# Allegro board sensor_board_routing.brd
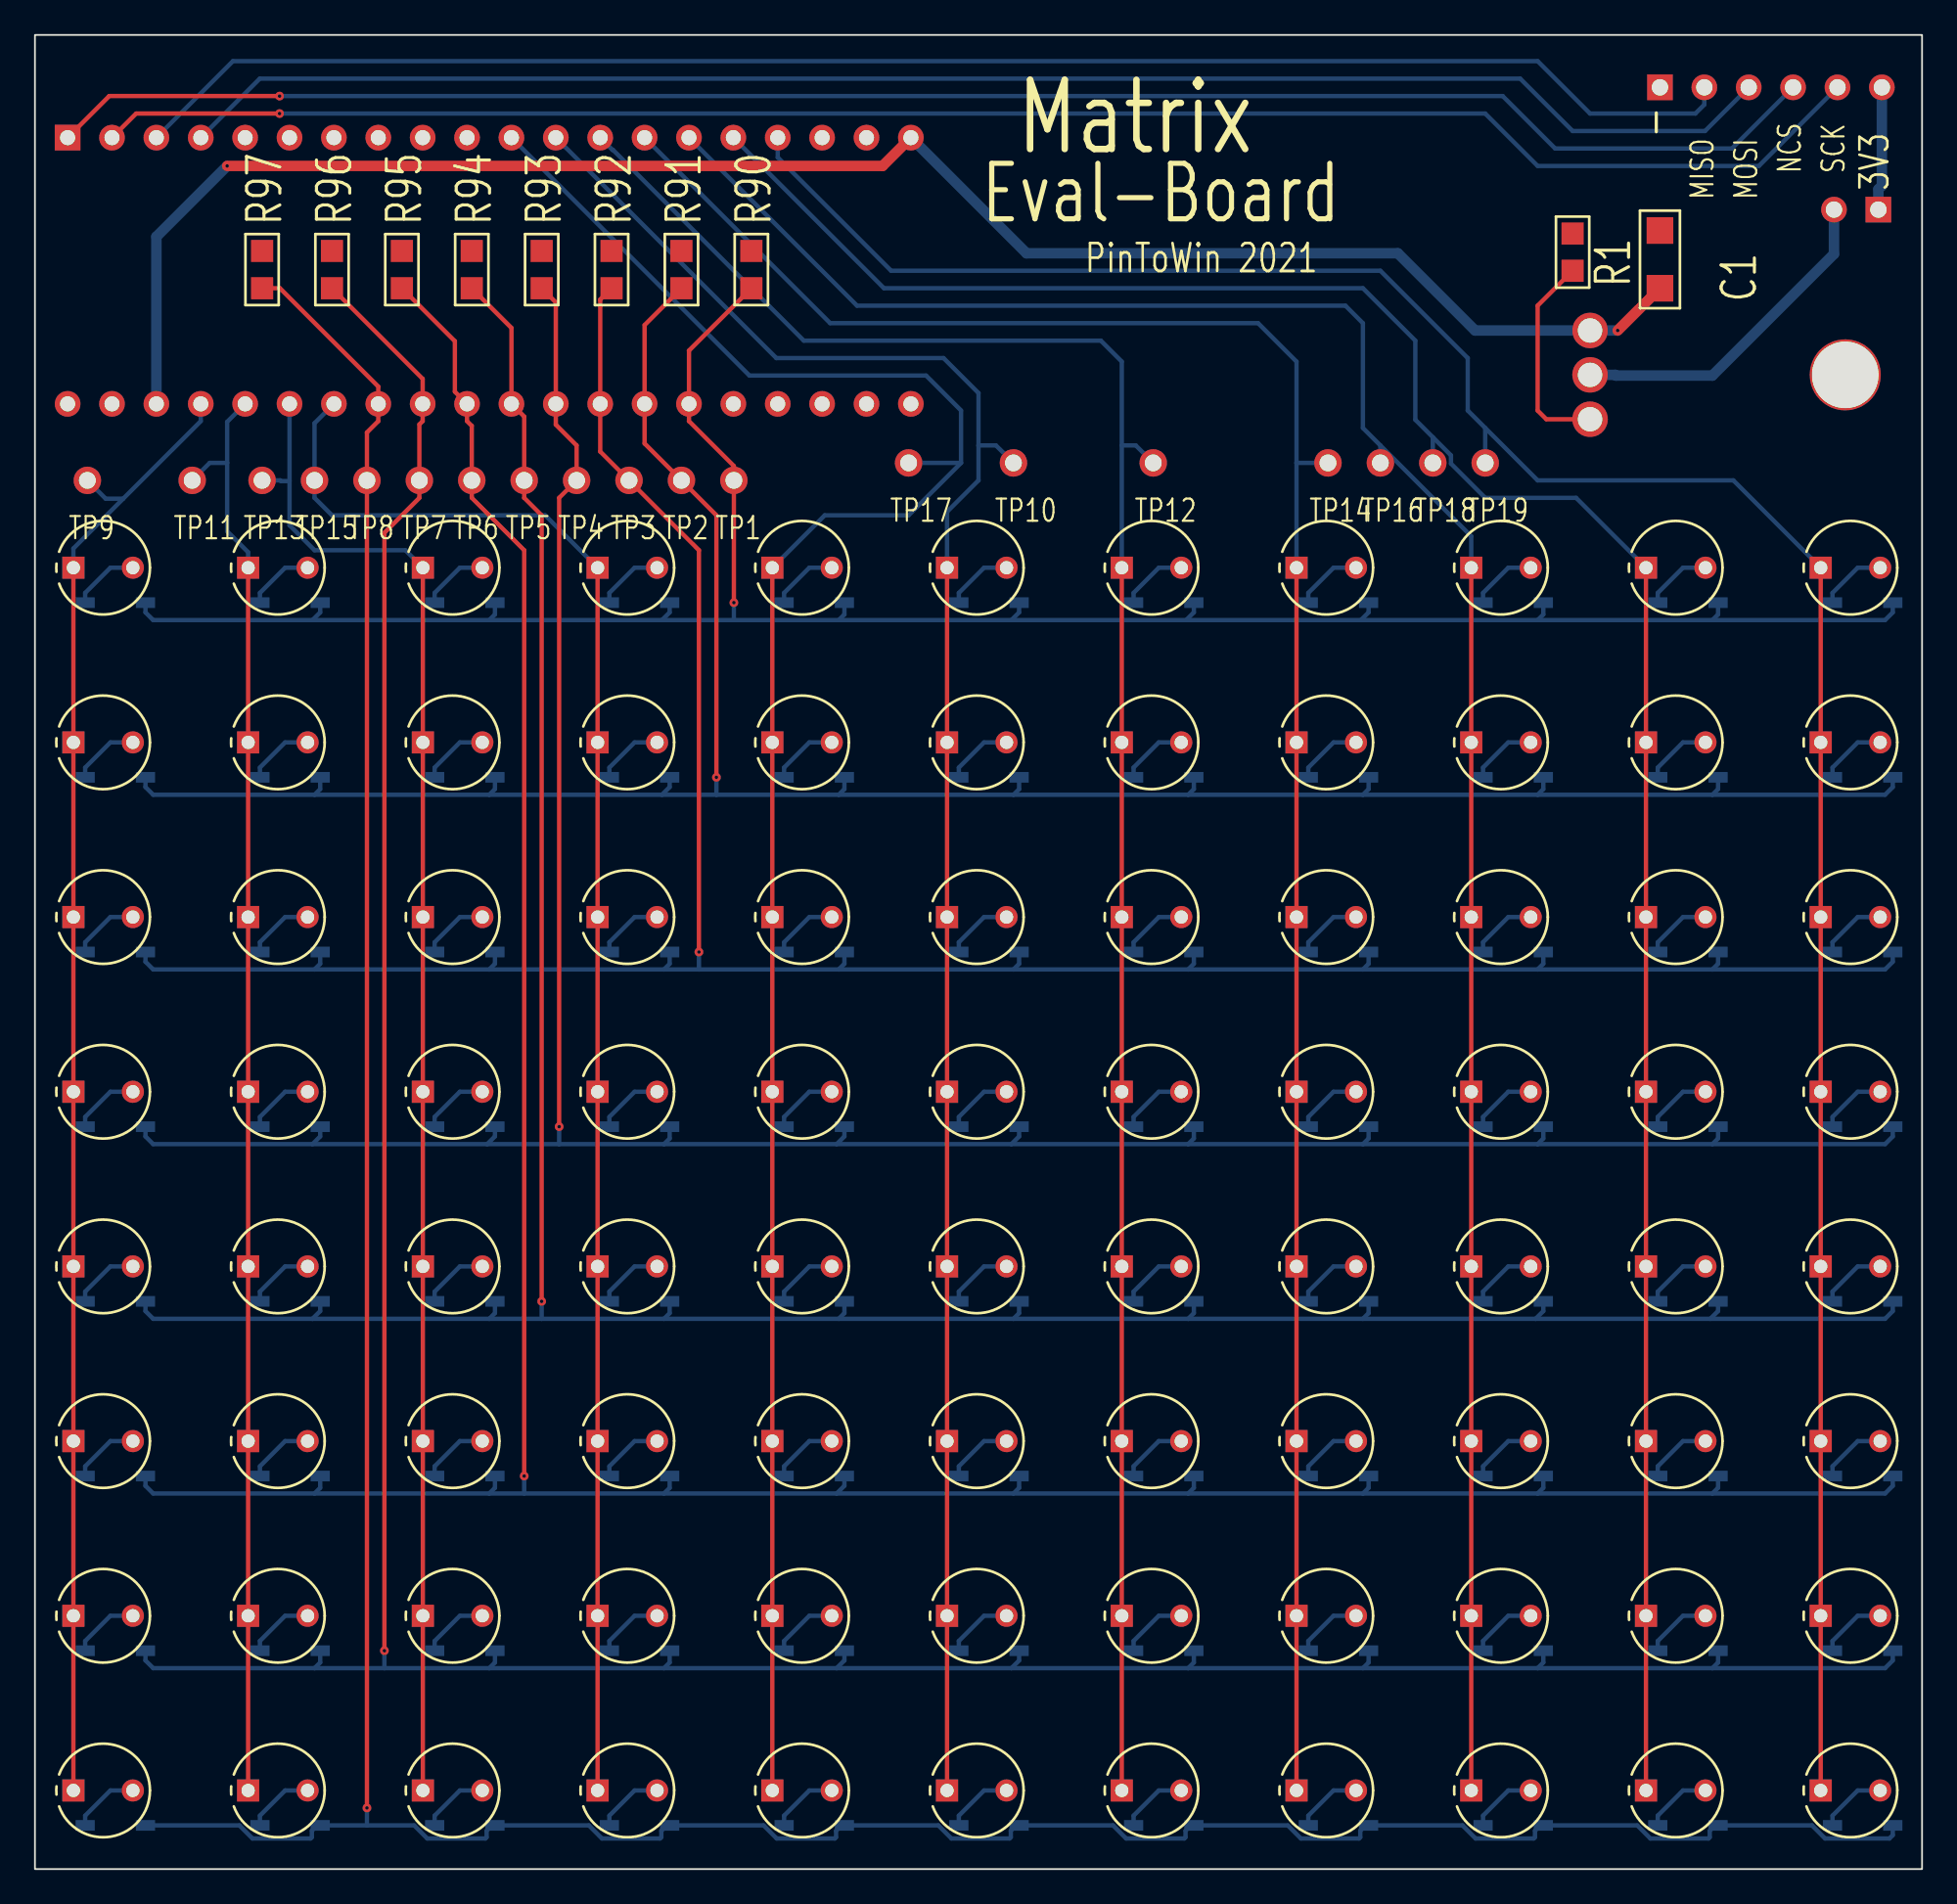
[diagram p0: board, top side]
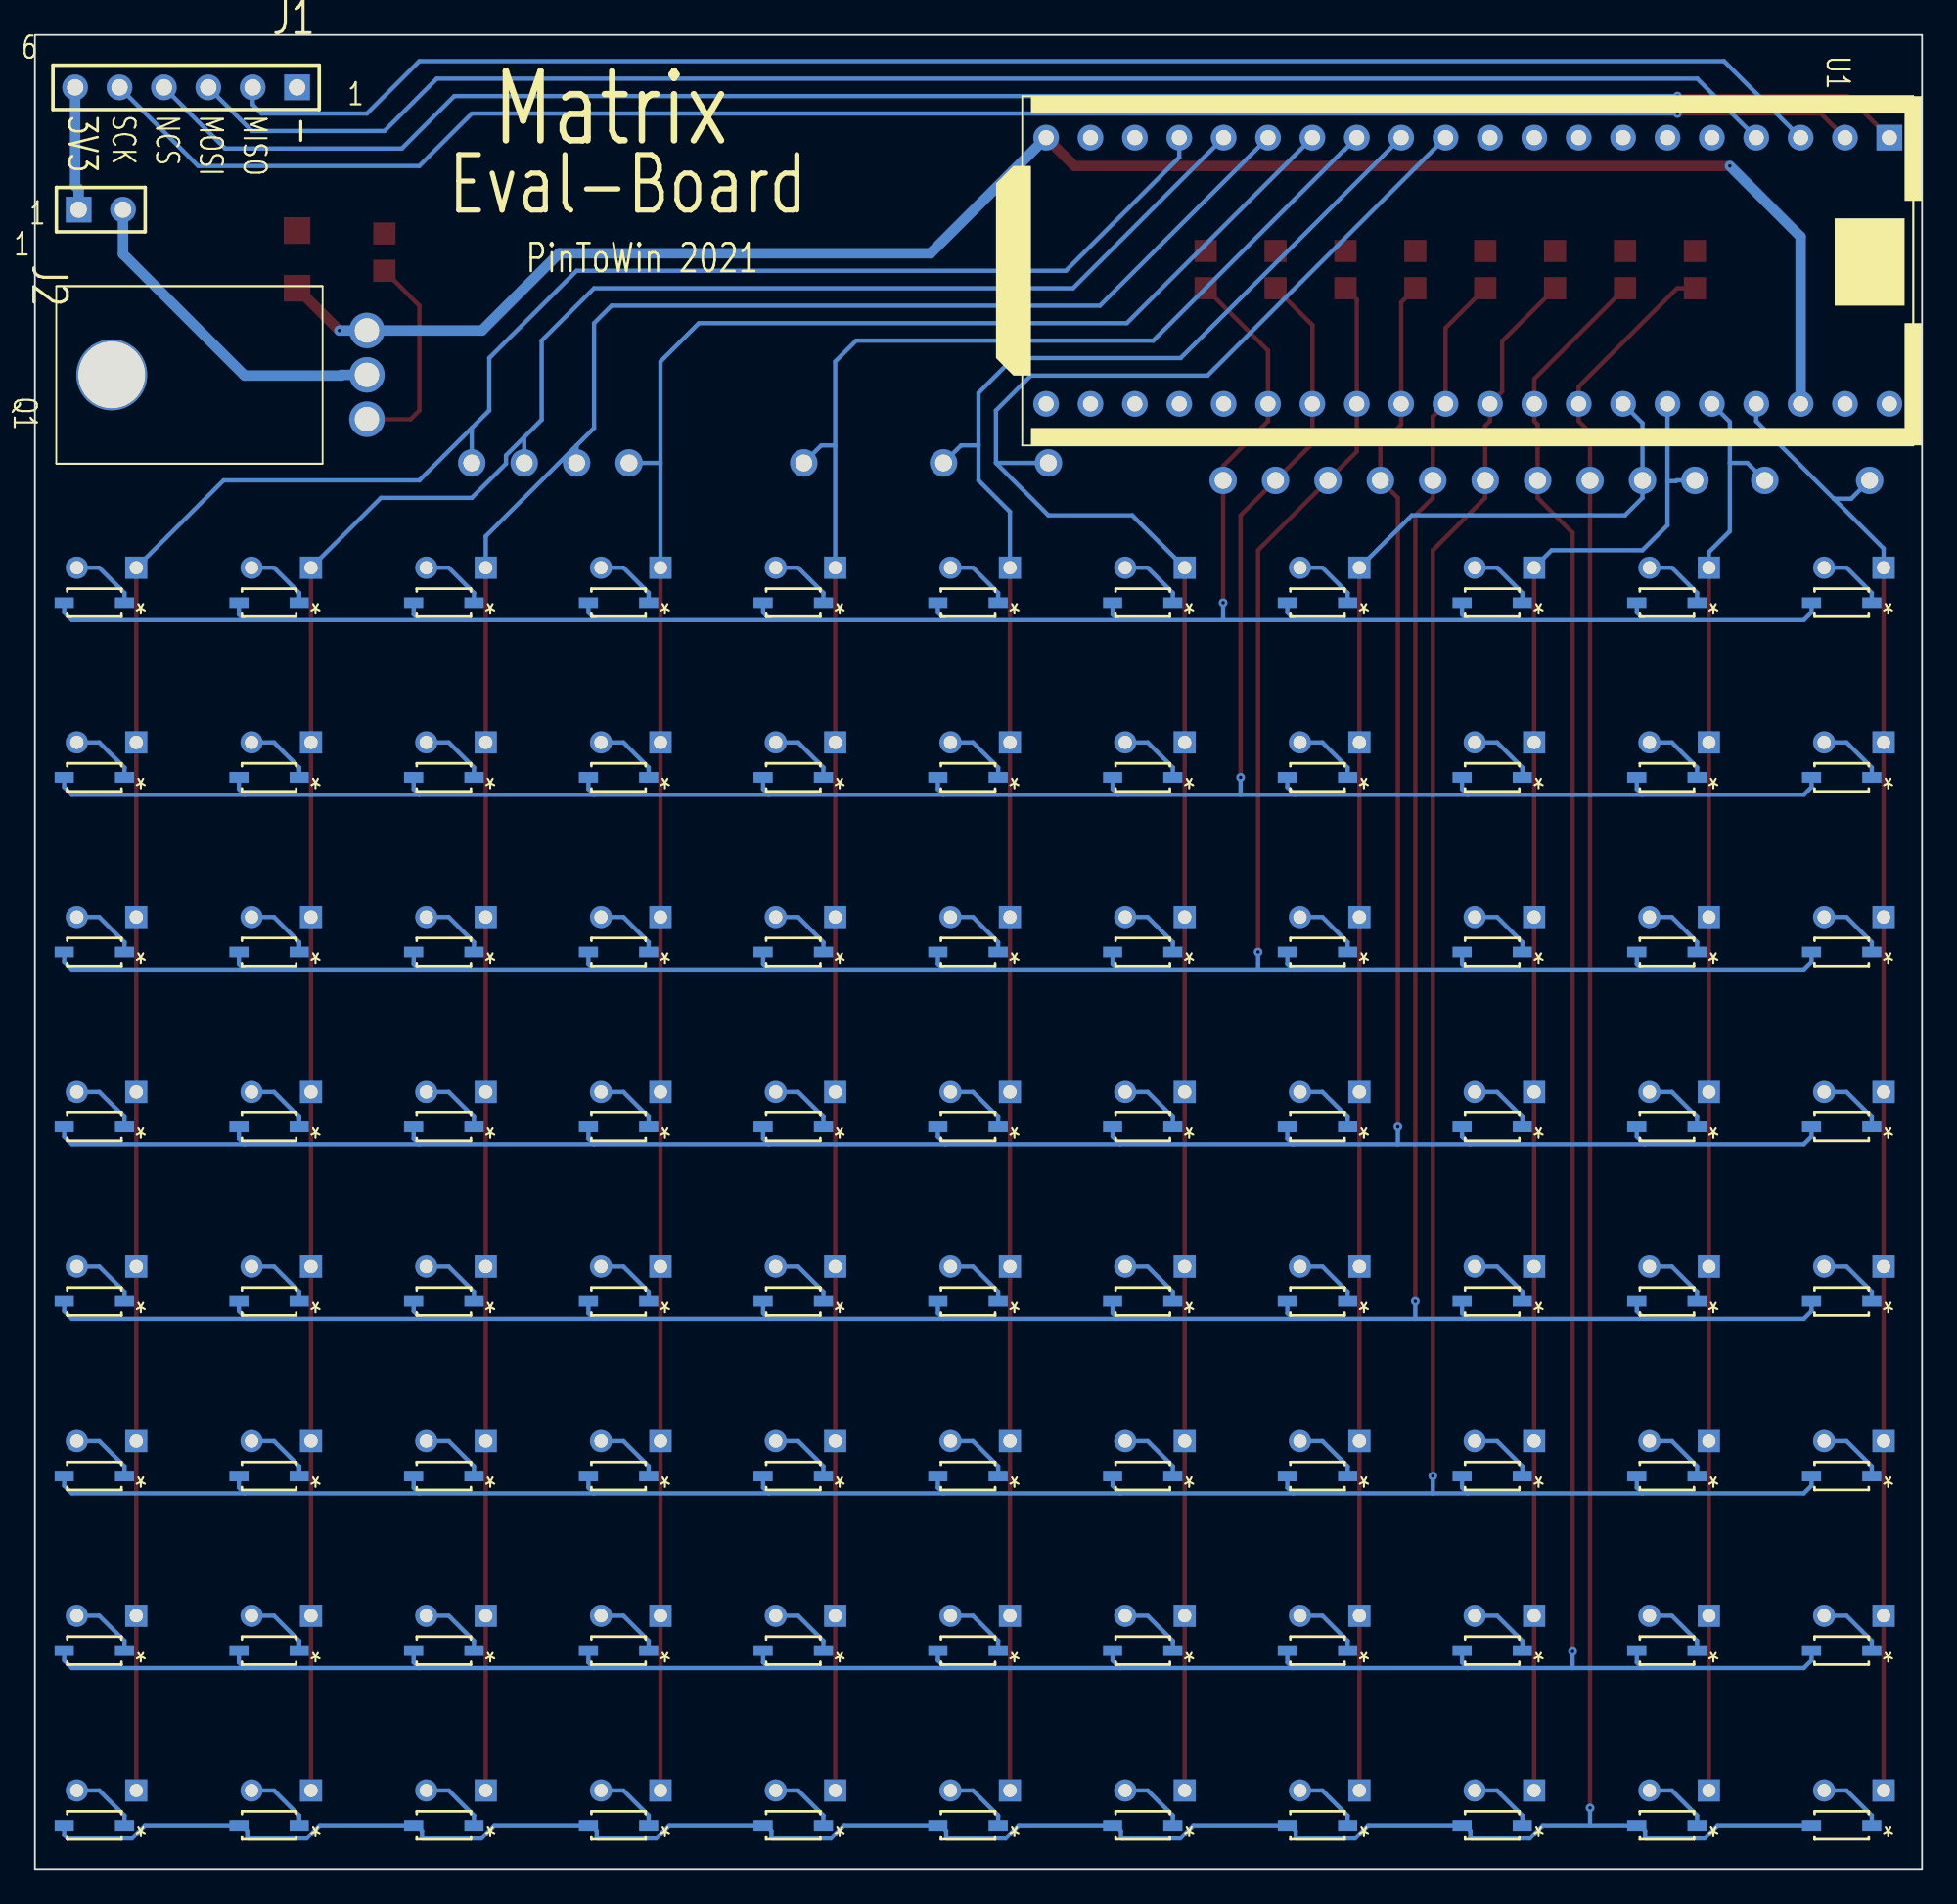
[diagram p1: board, bottom side, seen from below]

Outline 108 x 105 mm; copper layers: TOP, BOTTOM. Coordinates in mm from the lower left corner of the outline.
Outline path: rectangle 0,0 108,105

## Design rules (mm)
constraint set DEFAULT: min track width 0.1

## Placement (name value [footprint] x y rotation side)
C1  1uF  [SMC1206]  93 90.5 90 top
D1  D1N4148  [SOD123_DIO]  4.6 72.5 0 bottom
D2  D1N4148  [SOD123_DIO]  14.6 72.5 0 bottom
D3  D1N4148  [SOD123_DIO]  24.6 72.5 0 bottom
D4  D1N4148  [SOD123_DIO]  34.6 72.5 0 bottom
D5  D1N4148  [SOD123_DIO]  44.6 72.5 0 bottom
D6  D1N4148  [SOD123_DIO]  54.6 72.5 0 bottom
D7  D1N4148  [SOD123_DIO]  64.6 72.5 0 bottom
D8  D1N4148  [SOD123_DIO]  74.6 72.5 0 bottom
D9  D1N4148  [SOD123_DIO]  84.6 72.5 0 bottom
D10  D1N4148  [SOD123_DIO]  94.6 72.5 0 bottom
D11  D1N4148  [SOD123_DIO]  104.6 72.5 0 bottom
D12  D1N4148  [SOD123_DIO]  4.6 62.5 0 bottom
D13  D1N4148  [SOD123_DIO]  14.6 62.5 0 bottom
D14  D1N4148  [SOD123_DIO]  24.6 62.5 0 bottom
D15  D1N4148  [SOD123_DIO]  34.6 62.5 0 bottom
D16  D1N4148  [SOD123_DIO]  44.6 62.5 0 bottom
D17  D1N4148  [SOD123_DIO]  54.6 62.5 0 bottom
D18  D1N4148  [SOD123_DIO]  64.6 62.5 0 bottom
D19  D1N4148  [SOD123_DIO]  74.6 62.5 0 bottom
D20  D1N4148  [SOD123_DIO]  84.6 62.5 0 bottom
D21  D1N4148  [SOD123_DIO]  94.6 62.5 0 bottom
D22  D1N4148  [SOD123_DIO]  104.6 62.5 0 bottom
D23  D1N4148  [SOD123_DIO]  4.6 52.5 0 bottom
D24  D1N4148  [SOD123_DIO]  14.6 52.5 0 bottom
D25  D1N4148  [SOD123_DIO]  24.6 52.5 0 bottom
D26  D1N4148  [SOD123_DIO]  34.6 52.5 0 bottom
D27  D1N4148  [SOD123_DIO]  44.6 52.5 0 bottom
D28  D1N4148  [SOD123_DIO]  54.6 52.5 0 bottom
D29  D1N4148  [SOD123_DIO]  64.6 52.5 0 bottom
D30  D1N4148  [SOD123_DIO]  74.6 52.5 0 bottom
D31  D1N4148  [SOD123_DIO]  84.6 52.5 0 bottom
D32  D1N4148  [SOD123_DIO]  94.6 52.5 0 bottom
D33  D1N4148  [SOD123_DIO]  104.6 52.5 0 bottom
D34  D1N4148  [SOD123_DIO]  4.6 42.5 0 bottom
D35  D1N4148  [SOD123_DIO]  14.6 42.5 0 bottom
D36  D1N4148  [SOD123_DIO]  24.6 42.5 0 bottom
D37  D1N4148  [SOD123_DIO]  34.6 42.5 0 bottom
D38  D1N4148  [SOD123_DIO]  44.6 42.5 0 bottom
D39  D1N4148  [SOD123_DIO]  54.6 42.5 0 bottom
D40  D1N4148  [SOD123_DIO]  64.6 42.5 0 bottom
D41  D1N4148  [SOD123_DIO]  74.6 42.5 0 bottom
D42  D1N4148  [SOD123_DIO]  84.6 42.5 0 bottom
D43  D1N4148  [SOD123_DIO]  94.6 42.5 0 bottom
D44  D1N4148  [SOD123_DIO]  104.6 42.5 0 bottom
D45  D1N4148  [SOD123_DIO]  4.6 32.5 0 bottom
D46  D1N4148  [SOD123_DIO]  14.6 32.5 0 bottom
D47  D1N4148  [SOD123_DIO]  24.6 32.5 0 bottom
D48  D1N4148  [SOD123_DIO]  34.6 32.5 0 bottom
D49  D1N4148  [SOD123_DIO]  44.6 32.5 0 bottom
D50  D1N4148  [SOD123_DIO]  54.6 32.5 0 bottom
D51  D1N4148  [SOD123_DIO]  64.6 32.5 0 bottom
D52  D1N4148  [SOD123_DIO]  74.6 32.5 0 bottom
D53  D1N4148  [SOD123_DIO]  84.6 32.5 0 bottom
D54  D1N4148  [SOD123_DIO]  94.6 32.5 0 bottom
D55  D1N4148  [SOD123_DIO]  104.6 32.5 0 bottom
D56  D1N4148  [SOD123_DIO]  4.6 22.5 0 bottom
D57  D1N4148  [SOD123_DIO]  14.6 22.5 0 bottom
D58  D1N4148  [SOD123_DIO]  24.6 22.5 0 bottom
D59  D1N4148  [SOD123_DIO]  34.6 22.5 0 bottom
D60  D1N4148  [SOD123_DIO]  44.6 22.5 0 bottom
D61  D1N4148  [SOD123_DIO]  54.6 22.5 0 bottom
D62  D1N4148  [SOD123_DIO]  64.6 22.5 0 bottom
D63  D1N4148  [SOD123_DIO]  74.6 22.5 0 bottom
D64  D1N4148  [SOD123_DIO]  84.6 22.5 0 bottom
D65  D1N4148  [SOD123_DIO]  94.6 22.5 0 bottom
D66  D1N4148  [SOD123_DIO]  104.6 22.5 0 bottom
D67  D1N4148  [SOD123_DIO]  4.6 12.5 0 bottom
D68  D1N4148  [SOD123_DIO]  14.6 12.5 0 bottom
D69  D1N4148  [SOD123_DIO]  24.6 12.5 0 bottom
D70  D1N4148  [SOD123_DIO]  34.6 12.5 0 bottom
D71  D1N4148  [SOD123_DIO]  44.6 12.5 0 bottom
D72  D1N4148  [SOD123_DIO]  54.6 12.5 0 bottom
D73  D1N4148  [SOD123_DIO]  64.6 12.5 0 bottom
D74  D1N4148  [SOD123_DIO]  74.6 12.5 0 bottom
D75  D1N4148  [SOD123_DIO]  84.6 12.5 0 bottom
D76  D1N4148  [SOD123_DIO]  94.6 12.5 0 bottom
D77  D1N4148  [SOD123_DIO]  104.6 12.5 0 bottom
D78  D1N4148  [SOD123_DIO]  4.6 2.5 0 bottom
D79  D1N4148  [SOD123_DIO]  14.6 2.5 0 bottom
D80  D1N4148  [SOD123_DIO]  24.6 2.5 0 bottom
D81  D1N4148  [SOD123_DIO]  34.6 2.5 0 bottom
D82  D1N4148  [SOD123_DIO]  44.6 2.5 0 bottom
D83  D1N4148  [SOD123_DIO]  54.6 2.5 0 bottom
D84  D1N4148  [SOD123_DIO]  64.6 2.5 0 bottom
D85  D1N4148  [SOD123_DIO]  74.6 2.5 0 bottom
D86  D1N4148  [SOD123_DIO]  84.6 2.5 0 bottom
D87  D1N4148  [SOD123_DIO]  94.6 2.5 0 bottom
D88  D1N4148  [SOD123_DIO]  104.6 2.5 0 bottom
J1  CON6  [BLKCON100VHTM1SQW1006]  93 102 0 bottom
J2  JUMPER  [BLKCON100VHTM1SQW1002]  105.5 95 180 bottom
Q1  IRF9530N/TO220  [TO220ABH]  89 83 180 bottom
R1  100  [SMR0805]  88 91.5 90 top
R2  5k-20k  [LDR1_NTE]  2.2 74.5 0 top
R3  5k-20k  [LDR1_NTE]  12.2 74.5 0 top
R4  5k-20k  [LDR1_NTE]  22.2 74.5 0 top
R5  5k-20k  [LDR1_NTE]  32.2 74.5 0 top
R6  5k-20k  [LDR1_NTE]  42.2 74.5 0 top
R7  5k-20k  [LDR1_NTE]  52.2 74.5 0 top
R8  5k-20k  [LDR1_NTE]  62.2 74.5 0 top
R9  5k-20k  [LDR1_NTE]  72.2 74.5 0 top
R10  5k-20k  [LDR1_NTE]  82.2 74.5 0 top
R11  5k-20k  [LDR1_NTE]  92.2 74.5 0 top
R12  5k-20k  [LDR1_NTE]  102.2 74.5 0 top
R13  5k-20k  [LDR1_NTE]  2.2 64.5 0 top
R14  5k-20k  [LDR1_NTE]  12.2 64.5 0 top
R15  5k-20k  [LDR1_NTE]  22.2 64.5 0 top
R16  5k-20k  [LDR1_NTE]  32.2 64.5 0 top
R17  5k-20k  [LDR1_NTE]  42.2 64.5 0 top
R18  5k-20k  [LDR1_NTE]  52.2 64.5 0 top
R19  5k-20k  [LDR1_NTE]  62.2 64.5 0 top
R20  5k-20k  [LDR1_NTE]  72.2 64.5 0 top
R21  5k-20k  [LDR1_NTE]  82.2 64.5 0 top
R22  5k-20k  [LDR1_NTE]  92.2 64.5 0 top
R23  5k-20k  [LDR1_NTE]  102.2 64.5 0 top
R24  5k-20k  [LDR1_NTE]  2.2 54.5 0 top
R25  5k-20k  [LDR1_NTE]  12.2 54.5 0 top
R26  5k-20k  [LDR1_NTE]  22.2 54.5 0 top
R27  5k-20k  [LDR1_NTE]  32.2 54.5 0 top
R28  5k-20k  [LDR1_NTE]  42.2 54.5 0 top
R29  5k-20k  [LDR1_NTE]  52.2 54.5 0 top
R30  5k-20k  [LDR1_NTE]  62.2 54.5 0 top
R31  5k-20k  [LDR1_NTE]  72.2 54.5 0 top
R32  5k-20k  [LDR1_NTE]  82.2 54.5 0 top
R33  5k-20k  [LDR1_NTE]  92.2 54.5 0 top
R34  5k-20k  [LDR1_NTE]  102.2 54.5 0 top
R35  5k-20k  [LDR1_NTE]  2.2 44.5 0 top
R36  5k-20k  [LDR1_NTE]  12.2 44.5 0 top
R37  5k-20k  [LDR1_NTE]  22.2 44.5 0 top
R38  5k-20k  [LDR1_NTE]  32.2 44.5 0 top
R39  5k-20k  [LDR1_NTE]  42.2 44.5 0 top
R40  5k-20k  [LDR1_NTE]  52.2 44.5 0 top
R41  5k-20k  [LDR1_NTE]  62.2 44.5 0 top
R42  5k-20k  [LDR1_NTE]  72.2 44.5 0 top
R43  5k-20k  [LDR1_NTE]  82.2 44.5 0 top
R44  5k-20k  [LDR1_NTE]  92.2 44.5 0 top
R45  5k-20k  [LDR1_NTE]  102.2 44.5 0 top
R46  5k-20k  [LDR1_NTE]  2.2 34.5 0 top
R47  5k-20k  [LDR1_NTE]  12.2 34.5 0 top
R48  5k-20k  [LDR1_NTE]  22.2 34.5 0 top
R49  5k-20k  [LDR1_NTE]  32.2 34.5 0 top
R50  5k-20k  [LDR1_NTE]  42.2 34.5 0 top
R51  5k-20k  [LDR1_NTE]  52.2 34.5 0 top
R52  5k-20k  [LDR1_NTE]  62.2 34.5 0 top
R53  5k-20k  [LDR1_NTE]  72.2 34.5 0 top
R54  5k-20k  [LDR1_NTE]  82.2 34.5 0 top
R55  5k-20k  [LDR1_NTE]  92.2 34.5 0 top
R56  5k-20k  [LDR1_NTE]  102.2 34.5 0 top
R57  5k-20k  [LDR1_NTE]  2.2 24.5 0 top
R58  5k-20k  [LDR1_NTE]  12.2 24.5 0 top
R59  5k-20k  [LDR1_NTE]  22.2 24.5 0 top
R60  5k-20k  [LDR1_NTE]  32.2 24.5 0 top
R61  5k-20k  [LDR1_NTE]  42.2 24.5 0 top
R62  5k-20k  [LDR1_NTE]  52.2 24.5 0 top
R63  5k-20k  [LDR1_NTE]  62.2 24.5 0 top
R64  5k-20k  [LDR1_NTE]  72.2 24.5 0 top
R65  5k-20k  [LDR1_NTE]  82.2 24.5 0 top
R66  5k-20k  [LDR1_NTE]  92.2 24.5 0 top
R67  5k-20k  [LDR1_NTE]  102.2 24.5 0 top
R68  5k-20k  [LDR1_NTE]  2.2 14.5 0 top
R69  5k-20k  [LDR1_NTE]  12.2 14.5 0 top
R70  5k-20k  [LDR1_NTE]  22.2 14.5 0 top
R71  5k-20k  [LDR1_NTE]  32.2 14.5 0 top
R72  5k-20k  [LDR1_NTE]  42.2 14.5 0 top
R73  5k-20k  [LDR1_NTE]  52.2 14.5 0 top
R74  5k-20k  [LDR1_NTE]  62.2 14.5 0 top
R75  5k-20k  [LDR1_NTE]  72.2 14.5 0 top
R76  5k-20k  [LDR1_NTE]  82.2 14.5 0 top
R77  5k-20k  [LDR1_NTE]  92.2 14.5 0 top
R78  5k-20k  [LDR1_NTE]  102.2 14.5 0 top
R79  5k-20k  [LDR1_NTE]  2.2 4.5 0 top
R80  5k-20k  [LDR1_NTE]  12.2 4.5 0 top
R81  5k-20k  [LDR1_NTE]  22.2 4.5 0 top
R82  5k-20k  [LDR1_NTE]  32.2 4.5 0 top
R83  5k-20k  [LDR1_NTE]  42.2 4.5 0 top
R84  5k-20k  [LDR1_NTE]  52.2 4.5 0 top
R85  5k-20k  [LDR1_NTE]  62.2 4.5 0 top
R86  5k-20k  [LDR1_NTE]  72.2 4.5 0 top
R87  5k-20k  [LDR1_NTE]  82.2 4.5 0 top
R88  5k-20k  [LDR1_NTE]  92.2 4.5 0 top
R89  5k-20k  [LDR1_NTE]  102.2 4.5 0 top
R90  1k  [SMR0805]  41 90.5 90 top
R91  1k  [SMR0805]  37 90.5 90 top
R92  1k  [SMR0805]  33 90.5 90 top
R93  1k  [SMR0805]  29 90.5 90 top
R94  1k  [SMR0805]  25 90.5 90 top
R95  1k  [SMR0805]  21 90.5 90 top
R96  1k  [SMR0805]  17 90.5 90 top
R97  1k  [SMR0805]  13 90.5 90 top
TP1  ROW0  [TESTCOUP_CUSTOM]  40 79.5 0 top
TP2  ROW1  [TESTCOUP_CUSTOM]  37 79.5 0 top
TP3  ROW2  [TESTCOUP_CUSTOM]  34 79.5 0 top
TP4  ROW3  [TESTCOUP_CUSTOM]  31 79.5 0 top
TP5  ROW4  [TESTCOUP_CUSTOM]  28 79.5 0 top
TP6  ROW5  [TESTCOUP_CUSTOM]  25 79.5 0 top
TP7  ROW6  [TESTCOUP_CUSTOM]  22 79.5 0 top
TP8  ROW7  [TESTCOUP_CUSTOM]  19 79.5 0 top
TP9  COL0  [TESTCOUP_CUSTOM]  3 79.5 0 top
TP10  COL0  [TESTCOUP_CUSTOM]  56 80.5 0 top
TP11  COL0  [TESTCOUP_CUSTOM]  9 79.5 0 top
TP12  COL0  [TESTCOUP_CUSTOM]  64 80.5 0 top
TP13  COL0  [TESTCOUP_CUSTOM]  13 79.5 0 top
TP14  COL0  [TESTCOUP_CUSTOM]  74 80.5 0 top
TP15  COL0  [TESTCOUP_CUSTOM]  16 79.5 0 top
TP16  COL0  [TESTCOUP_CUSTOM]  77 80.5 0 top
TP17  COL0  [TESTCOUP_CUSTOM]  50 80.5 0 top
TP18  COL0  [TESTCOUP_CUSTOM]  80 80.5 0 top
TP19  COL0  [TESTCOUP_CUSTOM]  83 80.5 0 top
U1  STM32F411  [BLACKPILL_FOOTPRINT]  26 91.5 270 bottom

## Library data of the parts
C1 = CAP NP
D1-D88 = 1N4148: Tolerance: TOL
J1 = CON6
J2 = JUMPER
Q1 = IRF9530N/TO_0
R1 R90-R97 = R
R2-R89 = LDR: User Part Number: PN
TP1-TP19 = TEST POINT
U1 = STM32_Bluepill

## Footprints (pads in the part's own frame, mm; a bottom-side part is the same pattern mirrored in y, then rotated)
BLACKPILL_FOOTPRINT
  rect 1.473x1.473 hole 0.864: 1(-7.62,24.13)
  round 1.473 hole 0.864: 2(-7.62,21.59) 3(-7.62,19.05) 4(-7.62,16.51) 5(-7.62,13.97) 6(-7.62,11.43) 7(-7.62,8.89) 8(-7.62,6.35) 9(-7.62,3.81) 10(-7.62,1.27) 11(-7.62,-1.27) 12(-7.62,-3.81) 13(-7.62,-6.35) 14(-7.62,-8.89) 15(-7.62,-11.43) 16(-7.62,-13.97) 17(-7.62,-16.51) 18(-7.62,-19.05) 19(-7.62,-21.59) 20(-7.62,-24.13) 21(7.62,-24.13) 22(7.62,-21.59) 23(7.62,-19.05) 24(7.62,-16.51) 25(7.62,-13.97) 26(7.62,-11.43) 27(7.62,-8.89) 28(7.62,-6.35) 29(7.62,-3.81) 30(7.62,-1.27) 31(7.62,1.27) 32(7.62,3.81) 33(7.62,6.35) 34(7.62,8.89) 35(7.62,11.43) 36(7.62,13.97) 37(7.62,16.51) 38(7.62,19.05) 39(7.62,21.59) 40(7.62,24.13)
BLKCON100VHTM1SQW1002
  rect 1.473x1.473 hole 0.94: 1(0,0)
  round 1.473 hole 0.94: 2(2.54,0)
BLKCON100VHTM1SQW1006
  rect 1.473x1.473 hole 0.94: 1(0,0)
  round 1.473 hole 0.94: 2(2.54,0) 3(5.08,0) 4(7.62,0) 5(10.16,0) 6(12.7,0)
LDR1_NTE
  rect 1.27x1.27 hole 0.762: 1(0,0)
  round 1.27 hole 0.762: 2(3.404,0)
SMC1206
  rect 1.524x1.524 smd: 1(0,0) 2(3.302,0)
SMR0805
  rect 1.27x1.27 smd: 1(0,0) 2(2.134,0)
SOD123_DIO
  rect 1.1x0.61 smd: 1(-1.725,0) 2(1.725,0)
TESTCOUP_CUSTOM
  round 1.575 hole 0.965: 1(0,0)
TO220ABH
  round 2.032 hole 1.397: 1(0,0) 2(0,2.54) 3(0,5.08)
  round 4.064 hole 3.81: 4(-14.605,2.54)

## Nets
3V3: C1.1 Q1.3(S) U1.20 U1.38
GND: C1.2 J1.1 R1.2 R90.2 R91.2 R92.2 R93.2 R94.2 R95.2 R96.2 R97.2 U1.19 U1.39
VIN_5V: U1.18 U1.40(VIN_5V#40)
ADC0: D1.2 D2.2 D3.2 D4.2 D5.2 D6.2 D7.2 D8.2 D9.2 D10.2 D11.2 R90.1 TP1.1 U1.26
ADC1: D12.2 D13.2 D14.2 D15.2 D16.2 D17.2 D18.2 D19.2 D20.2 D21.2 D22.2 R91.1 TP2.1 U1.27
ADC2: D23.2 D24.2 D25.2 D26.2 D27.2 D28.2 D29.2 D30.2 D31.2 D32.2 D33.2 R92.1 TP3.1 U1.28
ADC3: D34.2 D35.2 D36.2 D37.2 D38.2 D39.2 D40.2 D41.2 D42.2 D43.2 D44.2 R93.1 TP4.1 U1.29
ADC4: D45.2 D46.2 D47.2 D48.2 D49.2 D50.2 D51.2 D52.2 D53.2 D54.2 D55.2 R94.1 TP5.1 U1.30
ADC5: D56.2 D57.2 D58.2 D59.2 D60.2 D61.2 D62.2 D63.2 D64.2 D65.2 D66.2 R95.1 TP6.1 U1.31
ADC6: D67.2 D68.2 D69.2 D70.2 D71.2 D72.2 D73.2 D74.2 D75.2 D76.2 D77.2 R96.1 TP7.1 U1.32
ADC7: D78.2 D79.2 D80.2 D81.2 D82.2 D83.2 D84.2 D85.2 D86.2 D87.2 D88.2 R97.1 TP8.1 U1.33
COL_SELECT_0: R2.1 R13.1 R24.1 R35.1 R46.1 R57.1 R68.1 R79.1 TP9.1 U1.37
COL_SELECT_1: R3.1 R14.1 R25.1 R36.1 R47.1 R58.1 R69.1 R80.1 TP11.1 U1.36
COL_SELECT_2: R4.1 R15.1 R26.1 R37.1 R48.1 R59.1 R70.1 R81.1 TP13.1 U1.35
COL_SELECT_3: R5.1 R16.1 R27.1 R38.1 R49.1 R60.1 R71.1 R82.1 TP15.1 U1.34
COL_SELECT_4: R6.1 R17.1 R28.1 R39.1 R50.1 R61.1 R72.1 R83.1 TP17.1 U1.11
COL_SELECT_5: R7.1 R18.1 R29.1 R40.1 R51.1 R62.1 R73.1 R84.1 TP10.1 U1.12
COL_SELECT_6: R8.1 R19.1 R30.1 R41.1 R52.1 R63.1 R74.1 R85.1 TP12.1 U1.13
COL_SELECT_7: R9.1 R20.1 R31.1 R42.1 R53.1 R64.1 R75.1 R86.1 TP14.1 U1.14
COL_SELECT_8: R10.1 R21.1 R32.1 R43.1 R54.1 R65.1 R76.1 R87.1 TP16.1 U1.15
COL_SELECT_9: R11.1 R22.1 R33.1 R44.1 R55.1 R66.1 R77.1 R88.1 TP18.1 U1.16
COL_SELECT_10: R12.1 R23.1 R34.1 R45.1 R56.1 R67.1 R78.1 R89.1 TP19.1 U1.17
MISO: J1.2 U1.3
MOSI: J1.3 U1.4
N00105_M_COL1_R-D: D11.1 R12.2
N00105_M_COL1_R-D1: D22.1 R23.2
N00105_M_COL1_R-D2: D33.1 R34.2
N00105_M_COL1_R-D3: D44.1 R45.2
N00105_M_COL1_R-D4: D55.1 R56.2
N00105_M_COL1_R-D5: D66.1 R67.2
N00105_M_COL1_R-D6: D77.1 R78.2
N00105_M_COL1_R-D7: D88.1 R89.2
N00105_M_COL12_R-D: D2.1 R3.2
N00105_M_COL12_R-D1: D13.1 R14.2
N00105_M_COL12_R-D2: D24.1 R25.2
N00105_M_COL12_R-D3: D35.1 R36.2
N00105_M_COL12_R-D4: D46.1 R47.2
N00105_M_COL12_R-D5: D57.1 R58.2
N00105_M_COL12_R-D6: D68.1 R69.2
N00105_M_COL12_R-D7: D79.1 R80.2
N00105_M_COL13_R-D: D3.1 R4.2
N00105_M_COL13_R-D1: D14.1 R15.2
N00105_M_COL13_R-D2: D25.1 R26.2
N00105_M_COL13_R-D3: D36.1 R37.2
N00105_M_COL13_R-D4: D47.1 R48.2
N00105_M_COL13_R-D5: D58.1 R59.2
N00105_M_COL13_R-D6: D69.1 R70.2
N00105_M_COL13_R-D7: D80.1 R81.2
N00105_M_COL14_R-D: D4.1 R5.2
N00105_M_COL14_R-D1: D15.1 R16.2
N00105_M_COL14_R-D2: D26.1 R27.2
N00105_M_COL14_R-D3: D37.1 R38.2
N00105_M_COL14_R-D4: D48.1 R49.2
N00105_M_COL14_R-D5: D59.1 R60.2
N00105_M_COL14_R-D6: D70.1 R71.2
N00105_M_COL14_R-D7: D81.1 R82.2
N00105_M_COL15_R-D: D5.1 R6.2
N00105_M_COL15_R-D1: D16.1 R17.2
N00105_M_COL15_R-D2: D27.1 R28.2
N00105_M_COL15_R-D3: D38.1 R39.2
N00105_M_COL15_R-D4: D49.1 R50.2
N00105_M_COL15_R-D5: D60.1 R61.2
N00105_M_COL15_R-D6: D71.1 R72.2
N00105_M_COL15_R-D7: D82.1 R83.2
N00105_M_COL16_R-D: D6.1 R7.2
N00105_M_COL16_R-D1: D17.1 R18.2
N00105_M_COL16_R-D2: D28.1 R29.2
N00105_M_COL16_R-D3: D39.1 R40.2
N00105_M_COL16_R-D4: D50.1 R51.2
N00105_M_COL16_R-D5: D61.1 R62.2
N00105_M_COL16_R-D6: D72.1 R73.2
N00105_M_COL16_R-D7: D83.1 R84.2
N00105_M_COL17_R-D: D7.1 R8.2
N00105_M_COL17_R-D1: D18.1 R19.2
N00105_M_COL17_R-D2: D29.1 R30.2
N00105_M_COL17_R-D3: D40.1 R41.2
N00105_M_COL17_R-D4: D51.1 R52.2
N00105_M_COL17_R-D5: D62.1 R63.2
N00105_M_COL17_R-D6: D73.1 R74.2
N00105_M_COL17_R-D7: D84.1 R85.2
N00105_M_COL18_R-D: D8.1 R9.2
N00105_M_COL18_R-D1: D19.1 R20.2
N00105_M_COL18_R-D2: D30.1 R31.2
N00105_M_COL18_R-D3: D41.1 R42.2
N00105_M_COL18_R-D4: D52.1 R53.2
N00105_M_COL18_R-D5: D63.1 R64.2
N00105_M_COL18_R-D6: D74.1 R75.2
N00105_M_COL18_R-D7: D85.1 R86.2
N00105_M_COL19_R-D: D9.1 R10.2
N00105_M_COL19_R-D1: D20.1 R21.2
N00105_M_COL19_R-D2: D31.1 R32.2
N00105_M_COL19_R-D3: D42.1 R43.2
N00105_M_COL19_R-D4: D53.1 R54.2
N00105_M_COL19_R-D5: D64.1 R65.2
N00105_M_COL19_R-D6: D75.1 R76.2
N00105_M_COL19_R-D7: D86.1 R87.2
N00105_M_COL20_R-D: D10.1 R11.2
N00105_M_COL20_R-D1: D21.1 R22.2
N00105_M_COL20_R-D2: D32.1 R33.2
N00105_M_COL20_R-D3: D43.1 R44.2
N00105_M_COL20_R-D4: D54.1 R55.2
N00105_M_COL20_R-D5: D65.1 R66.2
N00105_M_COL20_R-D6: D76.1 R77.2
N00105_M_COL20_R-D7: D87.1 R88.2
N00105_M_COL_R-D: D1.1 R2.2
N00105_M_COL_R-D1: D12.1 R13.2
N00105_M_COL_R-D2: D23.1 R24.2
N00105_M_COL_R-D3: D34.1 R35.2
N00105_M_COL_R-D4: D45.1 R46.2
N00105_M_COL_R-D5: D56.1 R57.2
N00105_M_COL_R-D6: D67.1 R68.2
N00105_M_COL_R-D7: D78.1 R79.2
NCS: J1.4 U1.1
SCK: J1.5 U1.2
N18545: J2.2 Q1.2
N18549: J1.6 J2.1
N18612: Q1.1 R1.1

Pads without a net: Q1 4; U1 5 6 7 8 9 10 21 22 23 24 25

## Via types
v1: diameter 0.5, hole 0.2, TOP to BOTTOM, 12 vias

## Routing (per net, layer and track width the routed paths; a pad name or vN(x,y) marks a point on that pad's centre or on a via; arc(x,y) is an arc through that point)
3V3: length 103.5
  TOP w0.6: v1(90.58,88.08) C1.1 ; v1(11,97.5) 48.51,97.5 U1.20
  BOTTOM w0.6: U1.20 56.75,92.5 78,92.5 82.42,88.08 Q1.3 v1(90.58,88.08) ; v1(11,97.5) 6.95,93.45 U1.38
ADC0: length 133.5
  TOP w0.25: R90.1 37.43,86.93 U1.26 37.43,82.89 40,80.32 TP1.1 v1(40,72.5)
  BOTTOM w0.25: 46,71.5 40,71.5 ; 46,71.5 46.33,71.83 46.33,72.5 ; 46,71.5 55.88,71.5 ; 40,71.5 35.88,71.5 ; 40,71.5 v1(40,72.5) ; 35.88,71.5 36.33,71.94 36.33,72.5 ; 35.88,71.5 26,71.5 ; 96,71.5 105.88,71.5 106.33,71.94 D11.2 ; 96,71.5 96.33,71.83 D10.2 ; 96,71.5 86,71.5 ; 15.88,71.5 6.77,71.5 6.33,71.94 D1.2 ; 15.88,71.5 16.33,71.94 D2.2 ; 15.88,71.5 26,71.5 ; 26,71.5 26.33,71.83 D3.2 ; 75.88,71.5 65.88,71.5 ; 75.88,71.5 76.33,71.94 D8.2 ; 75.88,71.5 86,71.5 ; 65.88,71.5 55.88,71.5 ; 65.88,71.5 66.33,71.94 D7.2 ; 55.88,71.5 56.33,71.94 D6.2 ; 86,71.5 86.33,71.83 86.33,72.5
ADC1: length 143.3
  TOP w0.25: R91.1 34.89,88.39 U1.27 34.89,81.61 TP2.1 39,77.5 v1(39,62.5)
  BOTTOM w0.25: 96,61.5 86,61.5 ; 96,61.5 105.88,61.5 106.33,61.94 D22.2 ; 96,61.5 96.33,61.83 D21.2 ; 86,61.5 86.33,61.83 86.33,62.5 ; 86,61.5 76,61.5 ; 46.33,62.5 46.33,61.83 46,61.5 ; 66,61.5 66.33,61.83 D18.2 ; 66,61.5 76,61.5 ; 66,61.5 56,61.5 ; 26,61.5 26.33,61.83 D14.2 ; 26,61.5 35.88,61.5 ; 26,61.5 16,61.5 ; 35.88,61.5 39,61.5 ; 35.88,61.5 36.33,61.94 36.33,62.5 ; D19.2 76.33,61.83 76,61.5 ; 46,61.5 39,61.5 ; 46,61.5 56,61.5 ; 39,61.5 v1(39,62.5) ; 56,61.5 56.33,61.83 D17.2 ; 16,61.5 16.33,61.83 D13.2 ; 16,61.5 6.77,61.5 6.33,61.94 D12.2
ADC2: length 153.3
  TOP w0.25: R92.1 32.35,89.85 U1.28 32.35,81.15 TP3.1 38,75.5 v1(38,52.5)
  BOTTOM w0.25: 36.33,52.5 36.33,51.83 36,51.5 ; 36,51.5 38,51.5 ; 36,51.5 26,51.5 ; 56,51.5 56.33,51.83 D28.2 ; 56,51.5 66,51.5 ; 56,51.5 46,51.5 ; 76,51.5 66,51.5 ; 76,51.5 76.33,51.83 D30.2 ; 76,51.5 86,51.5 ; 66,51.5 66.33,51.83 D29.2 ; v1(38,52.5) 38,51.5 ; 38,51.5 46,51.5 ; 46,51.5 46.33,51.83 46.33,52.5 ; 96,51.5 86,51.5 ; 96,51.5 105.88,51.5 106.33,51.94 D33.2 ; 96,51.5 96.33,51.83 D32.2 ; 86,51.5 86.33,51.83 86.33,52.5 ; 16,51.5 6.77,51.5 6.33,51.94 D23.2 ; 16,51.5 16.33,51.83 D24.2 ; 16,51.5 26,51.5 ; D25.2 26.33,51.83 26,51.5
ADC3: length 162.1
  TOP w0.25: v1(30,42.5) 30,78.5 TP4.1 31,81.5 29.81,82.69 U1.29 29.81,89.69 R93.1
  BOTTOM w0.25: 86,41.5 76,41.5 ; 86,41.5 96,41.5 ; 86,41.5 86.33,41.83 86.33,42.5 ; 76,41.5 76.33,41.83 D41.2 ; 76,41.5 66,41.5 ; 55.88,41.5 56.33,41.94 D39.2 ; 55.88,41.5 66,41.5 ; 55.88,41.5 45.88,41.5 ; D36.2 26.33,41.94 25.88,41.5 ; 96,41.5 96.33,41.83 D43.2 ; 96,41.5 105.88,41.5 106.33,41.94 D44.2 ; 25.88,41.5 30,41.5 ; 25.88,41.5 15.88,41.5 ; 36,41.5 30,41.5 ; 36,41.5 36.33,41.83 36.33,42.5 ; 36,41.5 45.88,41.5 ; 30,41.5 v1(30,42.5) ; 46.33,42.5 46.33,41.94 45.88,41.5 ; 66,41.5 66.33,41.83 D40.2 ; 15.88,41.5 6.77,41.5 6.33,41.94 D34.2 ; 15.88,41.5 16.33,41.94 D35.2
ADC4: length 172.5
  TOP w0.25: v1(29,32.5) 29,77.5 28,78.5 TP5.1 28,83.15 U1.30 27.27,88.23 R94.1
  BOTTOM w0.25: 95.88,31.5 85.88,31.5 ; 95.88,31.5 105.88,31.5 106.33,31.94 D55.2 ; 95.88,31.5 96.33,31.94 D54.2 ; 85.88,31.5 76,31.5 ; 85.88,31.5 86.33,31.94 86.33,32.5 ; 36,31.5 29,31.5 ; 36,31.5 36.33,31.83 36.33,32.5 ; 36,31.5 46,31.5 ; 29,31.5 v1(29,32.5) ; 29,31.5 26,31.5 ; 76,31.5 66,31.5 ; 76,31.5 76.33,31.83 D52.2 ; 66,31.5 56,31.5 ; 66,31.5 66.33,31.83 D51.2 ; 26,31.5 15.88,31.5 ; 26,31.5 26.33,31.83 D47.2 ; 15.88,31.5 6.77,31.5 6.33,31.94 D45.2 ; 15.88,31.5 16.33,31.94 D46.2 ; 56,31.5 56.33,31.83 D50.2 ; 56,31.5 46,31.5 ; 46,31.5 46.33,31.83 46.33,32.5
ADC5: length 183.6
  TOP w0.25: v1(28,22.5) 28,75.5 25,78.5 TP6.1 25,82.62 24.73,82.89 U1.31 24.03,84.58 24.03,87.47 R95.1
  BOTTOM w0.25: 86,21.5 76,21.5 ; 86,21.5 96,21.5 ; 86,21.5 86.33,21.83 86.33,22.5 ; 76,21.5 76.33,21.83 D63.2 ; 76,21.5 66,21.5 ; 45.88,21.5 36,21.5 ; 45.88,21.5 46.33,21.94 46.33,22.5 ; 45.88,21.5 56,21.5 ; 36,21.5 36.33,21.83 36.33,22.5 ; 36,21.5 28,21.5 ; 16,21.5 6.77,21.5 6.33,21.94 D56.2 ; 16,21.5 16.33,21.83 D57.2 ; 16,21.5 26,21.5 ; D58.2 26.33,21.83 26,21.5 ; 96,21.5 105.88,21.5 106.33,21.94 D66.2 ; 96,21.5 96.33,21.83 D65.2 ; 56,21.5 56.33,21.83 D61.2 ; 56,21.5 66,21.5 ; 28,21.5 26,21.5 ; 28,21.5 v1(28,22.5) ; 66,21.5 66.33,21.83 D62.2
ADC6: length 193.8
  TOP w0.25: v1(20,12.5) 20,76.5 22,78.5 TP7.1 22,82.7 22.19,82.89 U1.32 22.19,85.31 R96.1
  BOTTOM w0.25: 45.88,11.5 36,11.5 ; 45.88,11.5 55.88,11.5 ; 45.88,11.5 46.33,11.94 46.33,12.5 ; 36,11.5 26,11.5 ; 36,11.5 36.33,11.83 36.33,12.5 ; 26,11.5 20,11.5 ; 26,11.5 26.33,11.83 D69.2 ; 20,11.5 16,11.5 ; 20,11.5 v1(20,12.5) ; D76.2 96.33,11.83 96,11.5 ; 86,11.5 76,11.5 ; 86,11.5 96,11.5 ; 86,11.5 86.33,11.83 86.33,12.5 ; 76,11.5 66,11.5 ; 76,11.5 76.33,11.83 D74.2 ; 96,11.5 105.88,11.5 106.33,11.94 D77.2 ; 66,11.5 66.33,11.83 D73.2 ; 66,11.5 55.88,11.5 ; 16,11.5 16.33,11.83 D68.2 ; 16,11.5 6.77,11.5 6.33,11.94 D67.2 ; D72.2 56.33,11.94 55.88,11.5
ADC7: length 200.1
  TOP w0.25: v1(19,3.5) TP8.1 19,82.24 19.65,82.89 U1.33 19.65,84.87 14.02,90.5 R97.1
  BOTTOM w0.25: 19,2.5 D79.2 16.15,2.5 15.85,2.2 15.85,1.82 15.78,1.75 12.45,1.75 11.7,2.5 D78.2 ; 19,2.5 21.7,2.5 22.45,1.75 25.78,1.75 25.85,1.82 25.85,2.2 26.15,2.5 D80.2 31.7,2.5 32.45,1.75 35.78,1.75 35.85,1.82 35.85,2.2 36.15,2.5 41.7,2.5 42.45,1.75 45.78,1.75 45.85,1.82 45.85,2.2 46.15,2.5 51.7,2.5 52.45,1.75 55.78,1.75 55.85,1.82 55.85,2.2 56.15,2.5 D83.2 61.7,2.5 62.45,1.75 65.78,1.75 65.85,1.82 65.85,2.2 66.15,2.5 D84.2 71.7,2.5 72.45,1.75 75.78,1.75 75.85,1.82 75.85,2.2 76.15,2.5 D85.2 81.7,2.5 82.45,1.75 85.78,1.75 85.85,1.82 85.85,2.2 86.15,2.5 91.7,2.5 92.45,1.75 95.78,1.75 95.85,1.82 95.85,2.2 96.15,2.5 D87.2 101.7,2.5 102.45,1.75 106.13,1.75 106.33,1.94 D88.2 ; 19,2.5 v1(19,3.5)
COL_SELECT_0: length 84.9
  TOP w0.25: R2.1 R13.1 R24.1 R35.1 R46.1 R57.1 R68.1 R79.1
  BOTTOM w0.25: 5.05,78.45 4.05,78.45 TP9.1 ; 5.05,78.45 2.2,75.6 R2.1 ; 5.05,78.45 9.49,82.89 U1.37
COL_SELECT_1: length 82.7
  TOP w0.25: R80.1 R69.1 R58.1 R47.1 R36.1 R25.1 R14.1 R3.1
  BOTTOM w0.25: TP11.1 10,80.5 11,80.5 ; 11,80.5 11,82.85 U1.36 ; 11,80.5 11,76.59 12.2,75.39 R3.1
COL_SELECT_2: length 87.2
  TOP w0.25: R4.1 R15.1 R26.1 R37.1 R48.1 R59.1 R70.1 R81.1
  BOTTOM w0.25: U1.35 14.57,79.46 ; 14.57,79.46 14.57,76.93 16,75.5 21.2,75.5 R4.1 ; 14.57,79.46 14.08,79.46 14.04,79.5 TP13.1
COL_SELECT_3: length 93.7
  TOP w0.25: R5.1 R16.1 R27.1 R38.1 R49.1 R60.1 R71.1 R82.1
  BOTTOM w0.25: U1.34 16,82.77 TP15.1 16,78.5 17,77.5 29.2,77.5 R5.1
COL_SELECT_4: length 121.5
  TOP w0.25: R83.1 R72.1 R61.1 R50.1 R39.1 R28.1 R17.1 R6.1
  BOTTOM w0.25: U1.11 40.89,85.5 51,85.5 53,83.5 53,80.5 ; 53,80.5 50,77.5 45.2,77.5 R6.1 ; 53,80.5 TP17.1
COL_SELECT_5: length 113.4
  TOP w0.25: R7.1 R18.1 R29.1 R40.1 R51.1 R62.1 R73.1 R84.1
  BOTTOM w0.25: R7.1 52.2,77.7 54,79.5 54,81.5 ; U1.12 42.43,86.5 52,86.5 54,84.5 54,81.5 ; TP10.1 55,81.5 54,81.5
COL_SELECT_6: length 119.2
  TOP w0.25: R85.1 R74.1 R63.1 R52.1 R41.1 R30.1 R19.1 R8.1
  BOTTOM w0.25: 62.2,81.5 63,81.5 TP12.1 ; 62.2,81.5 62.2,86.3 61,87.5 44,87.5 33.08,98.42 33.05,98.42 U1.13 ; 62.2,81.5 R8.1
COL_SELECT_7: length 126.2
  TOP w0.25: R86.1 R75.1 R64.1 R53.1 R42.1 R31.1 R20.1 R9.1
  BOTTOM w0.25: U1.14 45.51,88.5 70,88.5 72.2,86.3 72.2,80.5 ; 72.2,80.5 TP14.1 ; 72.2,80.5 R9.1
COL_SELECT_8: length 130.5
  TOP w0.25: R10.1 R21.1 R32.1 R43.1 R54.1 R65.1 R76.1 R87.1
  BOTTOM w0.25: 77,81.5 TP16.1 ; 77,81.5 82.2,76.3 R10.1 ; 77,81.5 76,82.5 76,88.5 75,89.5 47.05,89.5 U1.15
COL_SELECT_9: length 136.8
  TOP w0.25: R88.1 R77.1 R66.1 R55.1 R44.1 R33.1 R22.1 R11.1
  BOTTOM w0.25: R11.1 88.2,78.5 83,78.5 81.04,80.46 81.04,80.93 80,81.97 ; 80,81.97 79,82.97 79,87.5 76,90.5 48.59,90.5 U1.16 ; 80,81.97 TP18.1
COL_SELECT_10: length 144.3
  TOP w0.25: R12.1 R23.1 R34.1 R45.1 R56.1 R67.1 R78.1 R89.1
  BOTTOM w0.25: 83,82.5 82,83.5 82,86.5 77,91.5 49,91.5 42.51,97.99 U1.17 ; 83,82.5 86,79.5 97.2,79.5 R12.1 ; 83,82.5 TP19.1
MISO: length 92.8
  BOTTOM w0.25: J1.2 95.54,101.01 95.03,100.5 89,100.5 86,103.5 11.33,103.5 U1.3
MOSI: length 92.3
  BOTTOM w0.25: J1.3 95.58,99.5 88,99.5 85,102.5 12.87,102.5 U1.4
N00105_M_COL1_R-D: length 3.9
  BOTTOM w0.25: R12.2 104.32,74.5 102.88,73.06 D11.1
N00105_M_COL1_R-D1: length 3.9
  BOTTOM w0.25: R23.2 104.32,64.5 102.88,63.06 D22.1
N00105_M_COL1_R-D2: length 3.9
  BOTTOM w0.25: D33.1 102.88,53.06 104.32,54.5 R34.2
N00105_M_COL1_R-D3: length 3.9
  BOTTOM w0.25: R45.2 104.32,44.5 102.88,43.06 D44.1
N00105_M_COL1_R-D4: length 3.9
  BOTTOM w0.25: D55.1 102.88,33.06 104.32,34.5 R56.2
N00105_M_COL1_R-D5: length 3.9
  BOTTOM w0.25: R67.2 104.32,24.5 102.88,23.06 D66.1
N00105_M_COL1_R-D6: length 3.9
  BOTTOM w0.25: D77.1 102.88,13.06 104.32,14.5 R78.2
N00105_M_COL1_R-D7: length 3.9
  BOTTOM w0.25: R89.2 104.32,4.5 102.88,3.06 D88.1
N00105_M_COL12_R-D: length 3.9
  BOTTOM w0.25: R3.2 14.32,74.5 12.88,73.06 D2.1
N00105_M_COL12_R-D1: length 3.9
  BOTTOM w0.25: R14.2 14.32,64.5 12.88,63.06 D13.1
N00105_M_COL12_R-D2: length 3.9
  BOTTOM w0.25: D24.1 12.88,53.06 14.32,54.5 R25.2
N00105_M_COL12_R-D3: length 3.9
  BOTTOM w0.25: R36.2 14.32,44.5 12.88,43.06 D35.1
N00105_M_COL12_R-D4: length 3.9
  BOTTOM w0.25: D46.1 12.88,33.06 14.32,34.5 R47.2
N00105_M_COL12_R-D5: length 3.9
  BOTTOM w0.25: R58.2 14.32,24.5 12.88,23.06 D57.1
N00105_M_COL12_R-D6: length 3.9
  BOTTOM w0.25: D68.1 12.88,13.06 14.32,14.5 R69.2
N00105_M_COL12_R-D7: length 3.9
  BOTTOM w0.25: D79.1 12.88,3.06 14.32,4.5 R80.2
N00105_M_COL13_R-D: length 3.9
  BOTTOM w0.25: D3.1 22.88,73.06 24.32,74.5 R4.2
N00105_M_COL13_R-D1: length 3.9
  BOTTOM w0.25: R15.2 24.32,64.5 22.88,63.06 D14.1
N00105_M_COL13_R-D2: length 3.9
  BOTTOM w0.25: R26.2 24.32,54.5 22.88,53.06 D25.1
N00105_M_COL13_R-D3: length 3.9
  BOTTOM w0.25: R37.2 24.32,44.5 22.88,43.06 D36.1
N00105_M_COL13_R-D4: length 3.9
  BOTTOM w0.25: R48.2 24.32,34.5 22.88,33.06 D47.1
N00105_M_COL13_R-D5: length 3.9
  BOTTOM w0.25: D58.1 22.88,23.06 24.32,24.5 R59.2
N00105_M_COL13_R-D6: length 3.9
  BOTTOM w0.25: R70.2 24.32,14.5 22.88,13.06 D69.1
N00105_M_COL13_R-D7: length 3.9
  BOTTOM w0.25: R81.2 24.32,4.5 22.88,3.06 D80.1
N00105_M_COL14_R-D: length 3.9
  BOTTOM w0.25: R5.2 34.32,74.5 32.88,73.06 D4.1
N00105_M_COL14_R-D1: length 3.9
  BOTTOM w0.25: R16.2 34.32,64.5 32.88,63.06 D15.1
N00105_M_COL14_R-D2: length 3.9
  BOTTOM w0.25: R27.2 34.32,54.5 32.88,53.06 D26.1
N00105_M_COL14_R-D3: length 3.9
  BOTTOM w0.25: R38.2 34.32,44.5 32.88,43.06 D37.1
N00105_M_COL14_R-D4: length 3.9
  BOTTOM w0.25: R49.2 34.32,34.5 32.88,33.06 D48.1
N00105_M_COL14_R-D5: length 3.9
  BOTTOM w0.25: D59.1 32.88,23.06 34.32,24.5 R60.2
N00105_M_COL14_R-D6: length 3.9
  BOTTOM w0.25: R71.2 34.32,14.5 32.88,13.06 D70.1
N00105_M_COL14_R-D7: length 3.9
  BOTTOM w0.25: R82.2 34.32,4.5 32.88,3.06 D81.1
N00105_M_COL15_R-D: length 3.9
  BOTTOM w0.25: R6.2 44.32,74.5 42.88,73.06 D5.1
N00105_M_COL15_R-D1: length 3.9
  BOTTOM w0.25: D16.1 42.88,63.06 44.32,64.5 R17.2
N00105_M_COL15_R-D2: length 3.9
  BOTTOM w0.25: R28.2 44.32,54.5 42.88,53.06 D27.1
N00105_M_COL15_R-D3: length 3.9
  BOTTOM w0.25: R39.2 44.32,44.5 42.88,43.06 D38.1
N00105_M_COL15_R-D4: length 3.9
  BOTTOM w0.25: D49.1 42.88,33.06 44.32,34.5 R50.2
N00105_M_COL15_R-D5: length 3.9
  BOTTOM w0.25: R61.2 44.32,24.5 42.88,23.06 D60.1
N00105_M_COL15_R-D6: length 3.9
  BOTTOM w0.25: D71.1 42.88,13.06 44.32,14.5 R72.2
N00105_M_COL15_R-D7: length 3.9
  BOTTOM w0.25: D82.1 42.88,3.06 44.32,4.5 R83.2
N00105_M_COL16_R-D: length 3.9
  BOTTOM w0.25: R7.2 54.32,74.5 52.88,73.06 D6.1
N00105_M_COL16_R-D1: length 3.9
  BOTTOM w0.25: R18.2 54.32,64.5 52.88,63.06 D17.1
N00105_M_COL16_R-D2: length 3.9
  BOTTOM w0.25: D28.1 52.88,53.06 54.32,54.5 R29.2
N00105_M_COL16_R-D3: length 3.9
  BOTTOM w0.25: D39.1 52.88,43.06 54.32,44.5 R40.2
N00105_M_COL16_R-D4: length 3.9
  BOTTOM w0.25: R51.2 54.32,34.5 52.88,33.06 D50.1
N00105_M_COL16_R-D5: length 3.9
  BOTTOM w0.25: D61.1 52.88,23.06 54.32,24.5 R62.2
N00105_M_COL16_R-D6: length 3.9
  BOTTOM w0.25: R73.2 54.32,14.5 52.88,13.06 D72.1
N00105_M_COL16_R-D7: length 3.9
  BOTTOM w0.25: R84.2 54.32,4.5 52.88,3.06 D83.1
N00105_M_COL17_R-D: length 3.9
  BOTTOM w0.25: D7.1 62.88,73.06 64.32,74.5 R8.2
N00105_M_COL17_R-D1: length 3.9
  BOTTOM w0.25: D18.1 62.88,63.06 64.32,64.5 R19.2
N00105_M_COL17_R-D2: length 3.9
  BOTTOM w0.25: R30.2 64.32,54.5 62.88,53.06 D29.1
N00105_M_COL17_R-D3: length 3.9
  BOTTOM w0.25: D40.1 62.88,43.06 64.32,44.5 R41.2
N00105_M_COL17_R-D4: length 3.9
  BOTTOM w0.25: R52.2 64.32,34.5 62.88,33.06 D51.1
N00105_M_COL17_R-D5: length 3.9
  BOTTOM w0.25: R63.2 64.32,24.5 62.88,23.06 D62.1
N00105_M_COL17_R-D6: length 3.9
  BOTTOM w0.25: R74.2 64.32,14.5 62.88,13.06 D73.1
N00105_M_COL17_R-D7: length 3.9
  BOTTOM w0.25: R85.2 64.32,4.5 62.88,3.06 D84.1
N00105_M_COL18_R-D: length 3.9
  BOTTOM w0.25: R9.2 74.32,74.5 72.88,73.06 D8.1
N00105_M_COL18_R-D1: length 3.9
  BOTTOM w0.25: D19.1 72.88,63.06 74.32,64.5 R20.2
N00105_M_COL18_R-D2: length 3.9
  BOTTOM w0.25: R31.2 74.32,54.5 72.88,53.06 D30.1
N00105_M_COL18_R-D3: length 3.9
  BOTTOM w0.25: D41.1 72.88,43.06 74.32,44.5 R42.2
N00105_M_COL18_R-D4: length 3.9
  BOTTOM w0.25: D52.1 72.88,33.06 74.32,34.5 R53.2
N00105_M_COL18_R-D5: length 3.9
  BOTTOM w0.25: D63.1 72.88,23.06 74.32,24.5 R64.2
N00105_M_COL18_R-D6: length 3.9
  BOTTOM w0.25: D74.1 72.88,13.06 74.32,14.5 R75.2
N00105_M_COL18_R-D7: length 3.9
  BOTTOM w0.25: D85.1 72.88,3.06 74.32,4.5 R86.2
N00105_M_COL19_R-D: length 3.9
  BOTTOM w0.25: R10.2 84.32,74.5 82.88,73.06 D9.1
N00105_M_COL19_R-D1: length 3.9
  BOTTOM w0.25: R21.2 84.32,64.5 82.88,63.06 D20.1
N00105_M_COL19_R-D2: length 3.9
  BOTTOM w0.25: R32.2 84.32,54.5 82.88,53.06 D31.1
N00105_M_COL19_R-D3: length 3.9
  BOTTOM w0.25: D42.1 82.88,43.06 84.32,44.5 R43.2
N00105_M_COL19_R-D4: length 3.9
  BOTTOM w0.25: R54.2 84.32,34.5 82.88,33.06 D53.1
N00105_M_COL19_R-D5: length 3.9
  BOTTOM w0.25: D64.1 82.88,23.06 84.32,24.5 R65.2
N00105_M_COL19_R-D6: length 3.9
  BOTTOM w0.25: R76.2 84.32,14.5 82.88,13.06 D75.1
N00105_M_COL19_R-D7: length 3.9
  BOTTOM w0.25: R87.2 84.32,4.5 82.88,3.06 D86.1
N00105_M_COL20_R-D: length 3.9
  BOTTOM w0.25: R11.2 94.32,74.5 92.88,73.06 D10.1
N00105_M_COL20_R-D1: length 3.9
  BOTTOM w0.25: R22.2 94.32,64.5 92.88,63.06 D21.1
N00105_M_COL20_R-D2: length 3.9
  BOTTOM w0.25: D32.1 92.88,53.06 94.32,54.5 R33.2
N00105_M_COL20_R-D3: length 3.9
  BOTTOM w0.25: D43.1 92.88,43.06 94.32,44.5 R44.2
N00105_M_COL20_R-D4: length 3.9
  BOTTOM w0.25: D54.1 92.88,33.06 94.32,34.5 R55.2
N00105_M_COL20_R-D5: length 3.9
  BOTTOM w0.25: R66.2 94.32,24.5 92.88,23.06 D65.1
N00105_M_COL20_R-D6: length 3.9
  BOTTOM w0.25: D76.1 92.88,13.06 94.32,14.5 R77.2
N00105_M_COL20_R-D7: length 3.9
  BOTTOM w0.25: D87.1 92.88,3.06 94.32,4.5 R88.2
N00105_M_COL_R-D: length 3.9
  BOTTOM w0.25: D1.1 2.88,73.06 4.32,74.5 R2.2
N00105_M_COL_R-D1: length 3.9
  BOTTOM w0.25: D12.1 2.88,63.06 4.32,64.5 R13.2
N00105_M_COL_R-D2: length 3.9
  BOTTOM w0.25: D23.1 2.88,53.06 4.32,54.5 R24.2
N00105_M_COL_R-D3: length 3.9
  BOTTOM w0.25: D34.1 2.88,43.06 4.32,44.5 R35.2
N00105_M_COL_R-D4: length 3.9
  BOTTOM w0.25: D45.1 2.88,33.06 4.32,34.5 R46.2
N00105_M_COL_R-D5: length 3.9
  BOTTOM w0.25: D56.1 2.88,23.06 4.32,24.5 R57.2
N00105_M_COL_R-D6: length 3.9
  BOTTOM w0.25: R68.2 4.32,14.5 2.88,13.06 D67.1
N00105_M_COL_R-D7: length 3.9
  BOTTOM w0.25: R79.2 4.32,4.5 2.88,3.06 D78.1
NCS: length 102.4
  TOP w0.25: U1.1 4.25,101.5 v1(14,101.5)
  BOTTOM w0.25: J1.4 97.12,98.5 87,98.5 84,101.5 v1(14,101.5)
SCK: length 102.4
  TOP w0.25: U1.2 5.79,100.5 v1(14,100.5)
  BOTTOM w0.25: J1.5 98.66,97.5 86,97.5 83,100.5 v1(14,100.5)
N18545: length 19.4
  BOTTOM w0.6: J2.2 102.96,92.46 96,85.5 90.48,85.5 90.44,85.54 Q1.2
N18549: length 7.4
  BOTTOM w0.6: 105.5,95.16 J2.1 ; 105.5,95.16 105.5,96.16 105.7,96.36 J1.6 ; 105.5,95.16 105.7,95.36
N18612: length 12
  TOP w0.25: R1.1 86,89.5 86,83.5 86.5,83 Q1.1

## Text on the board
Ref Des/Silkscreen Bottom: MISO | MOSI | NCS | SCK | PinToWin 2021 | 3V3 | - | Eval-Board | Matrix
Ref Des/Silkscreen Top: MISO | MOSI | NCS | SCK | PinToWin 2021 | 3V3 | - | Eval-Board | Matrix
NCLEGEND-1-2: FIGURE | FINISHED_SIZE | 0.2 | 0.762 | 0.8636 | 0.9398 | 1.397 | 3.81 | DRILL CHART: TOP to BOTTOM | ALL UNITS ARE IN MILLIMETERS | TOLERANCE_DRILL | +0.1/-0.1 | +0.0/-0.0 | PLATED | QTY | 12 | 176 | 40 | 8 | 3 | 1
